# Allegro board CHOPPINGWAVE.brd
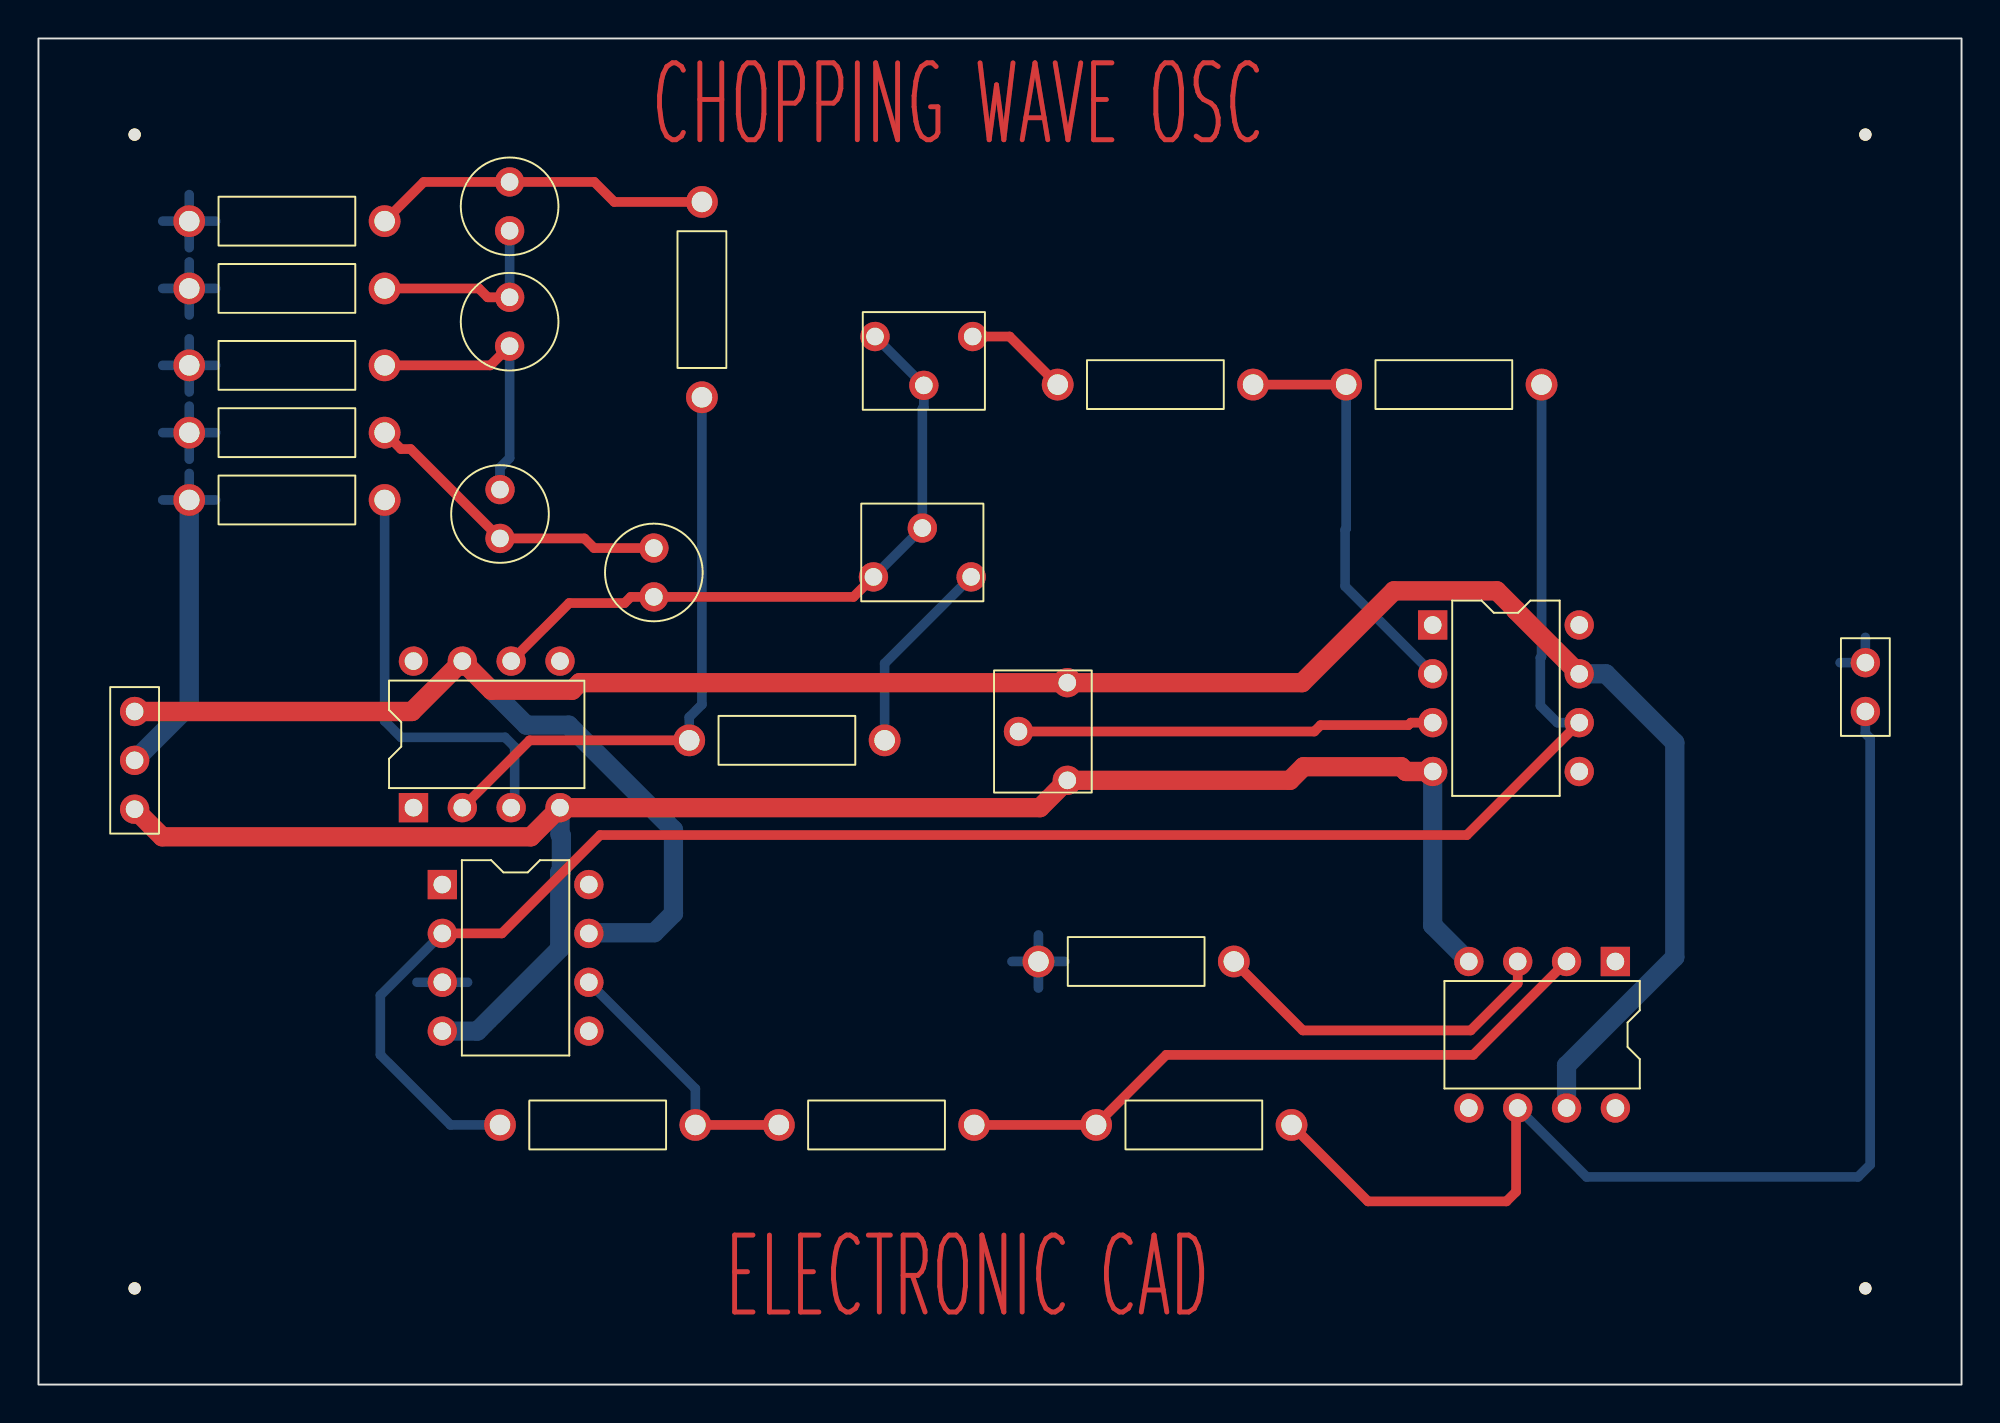
[diagram p0: board, top side]
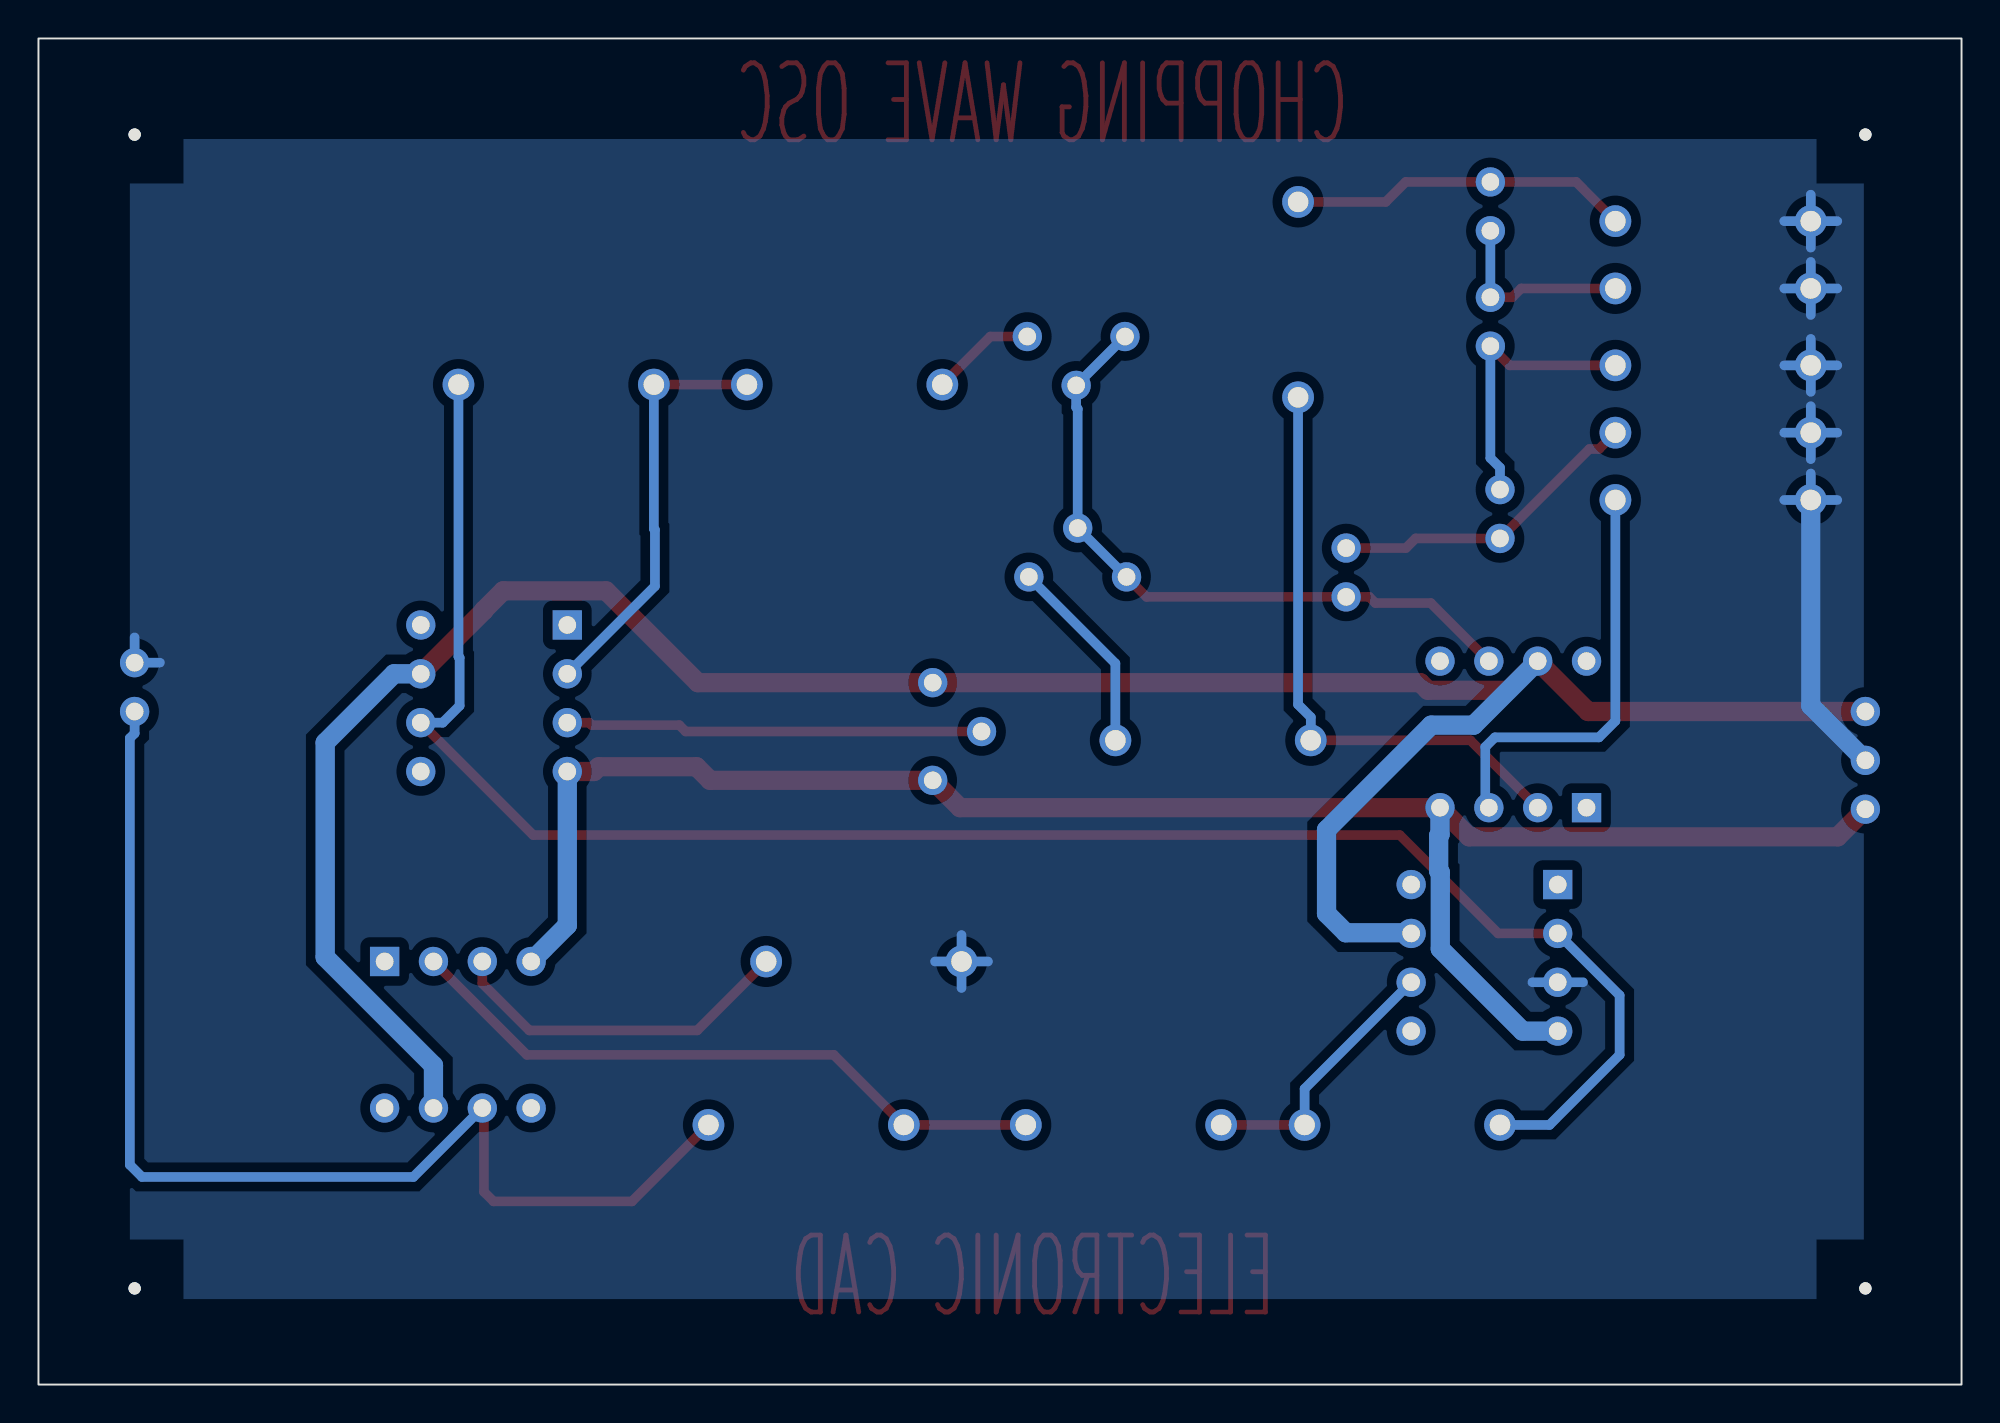
[diagram p1: board, bottom side, seen from below]

Outline 100 x 70 mm; copper layers: TOP, BOTTOM. Coordinates in mm from the lower left corner of the outline.
Outline path: rectangle 0,0 100,70

## Design rules (mm)
nets with their own width: min track width 0.5; nets N000400 N00626 N00633 N00647 N00661 N00679 N00693 N00738 N00771 N00801 N00837 N01571 N01590 N01600 OUT SIG
nets with their own width: min track width 1; nets +12V -12V GND

## Placement (name value [footprint] x y rotation side)
C1  0.01uF  [CAP196]  32 43.5 180 top
C2  0.01uF  [CAP196]  24 44 0 top
C3  0.01uF  [CAP196]  24.5 54 0 top
C4  0.01uF  [CAP196]  24.5 60 0 top
J1  CON3  [JUMPER3]  5 35 270 top
J2  CON2  [JUMPER2]  95 35 90 top
NOREF  -  [unnamed]  5 5 0 top
NOREF#2  -  [#2]  100 0 90 top
NOREF#3  -  [unnamed]  5 65 0 top
NOREF#4  -  [#2]  0 70 0 top
NOREF#5  -  [unnamed]  95 65 0 top
NOREF#6  -  [unnamed]  95 5 0 top
R1  10k  [RES400]  68 52 270 top
R2  15k  [RES400]  44 33.5 90 top
R3  10k  [RES400]  34.5 61.5 180 top
R4  20k  [RES400]  53 52 270 top
R5  4.7k  [RES400]  18 49.5 90 top
R6  4.7k  [RES400]  18 53 90 top
R7  4.7k  [RES400]  18 57 90 top
R8  4.7k  [RES400]  18 60.5 90 top
R9  1k  [RES400]  18 46 90 top
R10  8.2k  [RES400]  24 13.5 270 top
R11  10k  [RES400]  55 13.5 270 top
R12  2.2k  [RES400]  38.5 13.5 270 top
R13  5.1k  [RES400]  52 22 270 top
U1  LF356  [DIP8_3]  19.5 30 90 top
U2  LF356  [DIP8_3]  72.5 39.5 0 top
U3  LF356  [DIP8_3]  21 26 0 top
U4  LF356  [DIP8_3]  82 22 270 top
VR1  470k  [RESADJ]  48.5 42 270 top
VR2  100k  [RESADJ]  43.5 54.5 90 top
VR3  10k  [RESADJ]  53.5 36.5 0 top

## Library data of the parts
C1-C4 = CAP NP: Tolerance: ***; User Part Number: ***
J1 = CON3: User Part Number: ***
J2 = CON2: User Part Number: ***
R1-R13 = R: Tolerance: ***; User Part Number: ***
U1-U4 = LF356_3: Tolerance: ***; User Part Number: ***
VR1-VR3 = POT: Tolerance: ***; User Part Number: ***

## Footprints (pads in the part's own frame, mm; a bottom-side part is the same pattern mirrored in y, then rotated)
CAP196
  round 1.524 hole 0.914: 1(0,0) 2(0,2.54)
DIP8_3
  rect 1.524x1.524 hole 0.914: 1(0,0)
  round 1.524 hole 0.914: 2(0,-2.54) 3(0,-5.08) 4(0,-7.62) 5(7.62,-7.62) 6(7.62,-5.08) 7(7.62,-2.54) 8(7.62,0)
JUMPER2
  round 1.524 hole 0.914: 1(0,0) 2(2.54,0)
JUMPER3
  round 1.524 hole 0.914: 1(0,0) 2(2.54,0) 3(5.08,0)
RES400
  round 1.651 hole 1.067: 1(0,0) 2(0,10.16)
RESADJ
  round 1.524 hole 0.914: 1(0,0) 2(-2.54,-2.54) 3(0,-5.08)
unnamed
  round 0.635 hole 3.175 unplated: (0,0)

## Nets
+12V: J1.1 U1.7 U2.7 U3.7 U4.7 VR3.1
-12V: J1.3 U1.4(V-) U2.4(V-) U3.4(V-) U4.4(V-) VR3.3
GND: J1.2 J2.2 R5.2 R6.2 R7.2 R8.2 R9.2 R13.1 U3.3
OUT: J2.1 R11.2 U4.6
SIG: R1.2 R10.1 U2.6 U3.2
N000400: R2.1 VR1.1
N00626: C1.1 C2.1 R5.1
N00633: C2.2 C3.1 R6.1
N00647: C3.2 C4.1 R7.1
N00661: C4.2 R3.1 R8.1
N00679: R2.2 R3.2 U1.2
N00693: R9.1 U1.3
N00738: C1.2 U1.6 VR1.2(WIPER) VR1.3 VR2.1 VR2.2(WIPER)
N00771: R4.1 VR2.3
N00801: U2.3 VR3.2(WIPER)
N00837: R1.1 R4.2 U2.2
N01571: R11.1 R12.2 U4.2
N01590: R10.2 R12.1 U3.6
N01600: R13.2 U4.3

Pads without a net: U1 1 5 8; U2 1 5 8; U3 1 5 8; U4 1 5 8

## Routing (per net, layer and track width the routed paths; a pad name or vN(x,y) marks a point on that pad's centre or on a via; arc(x,y) is an arc through that point)
+12V: length 132.4
  TOP w1: J1.1 19.42,35 U1.7 23.56,36.1 27.75,36.1 28.14,36.5 VR3.1 65.71,36.5 70.48,41.27 75.83,41.27 76.83,40.27 76.83,40.24 U2.7
  BOTTOM w1: U4.7 79.46,16.59 85.09,22.23 85.09,33.38 81.51,36.96 U2.7 ; U3.7 28.66,23.5 32.02,23.5 33.02,24.5 33.02,28.84 27.57,34.29 25.37,34.29 U1.7
-12V: length 95.6
  TOP w1: J1.3 6.44,28.48 25.6,28.48 U1.4 52.08,30 VR3.3 65.08,31.42 65.78,32.13 70.86,32.13 71.11,31.88 U2.4
  BOTTOM w1: U3.4 22.82,18.38 27.1,22.66 27.1,26.63 27.19,26.71 27.19,28.54 27.12,28.61 U1.4 ; U2.4 72.5,23.88 U4.4
GND: length 51.7
  BOTTOM w0.5: 6.46,60.5 R8.2 ; R8.2 9.22,60.5 ; R8.2 7.84,59.12 ; R8.2 7.84,61.88 ; 6.46,46 R9.2 ; R9.2 9.22,46 ; R9.2 7.84,47.38 ; 95,38.85 J2.2 93.69,37.54 ; R7.2 7.84,58.38 ; R7.2 9.22,57 ; R7.2 7.84,55.62 ; R7.2 6.46,57 ; 6.46,53 R6.2 ; R6.2 7.84,51.62 ; R6.2 9.22,53 ; R6.2 7.84,54.38 ; 50.62,22 R13.1 ; R13.1 52,23.38 ; R13.1 52,20.62 ; R13.1 53.38,22 ; 22.32,20.92 U3.3 19.68,20.92 ; 6.46,49.5 R5.2 ; R5.2 7.84,50.88 ; R5.2 9.22,49.5 ; R5.2 7.84,48.12
  BOTTOM w1: R9.2 7.84,35.3 J1.2
OUT: length 61.7
  TOP w0.5: R11.2 69.14,9.53 76.33,9.53 76.83,10.03 76.83,14.29 U4.6
  BOTTOM w0.5: J2.1 95,33.86 95.25,33.61 95.25,11.43 94.61,10.79 80.5,10.79 U4.6
SIG: length 98.1
  TOP w0.5: U3.2 24.09,23.46 29.21,28.57 74.28,28.57 U2.6
  BOTTOM w0.5: R10.1 21.43,13.5 17.78,17.14 17.78,20.24 U3.2 ; R1.2 78.16,37.86 78.1,37.8 78.1,35.3 78.98,34.42 U2.6
N000400: length 10.4
  BOTTOM w0.5: R2.1 44,37.5 VR1.1
N00626: length 16.5
  TOP w0.5: C1.1 28.89,43.5 28.39,44 C2.1 19.35,48.65 18.85,48.65 R5.1
N00633: length 14.6
  TOP w0.5: C3.1 23.5,53 R6.1
  BOTTOM w0.5: C2.2 24,47.68 24.5,48.18 C3.1
N00647: length 10.2
  TOP w0.5: C3.2 23.36,56.54 22.9,57 R7.1
  BOTTOM w0.5: C4.1 C3.2
N00661: length 17.8
  TOP w0.5: R8.1 20.04,62.54 C4.2 28.9,62.54 29.94,61.5 R3.1
N00679: length 31.4
  TOP w0.5: R2.2 25.54,33.5 U1.2
  BOTTOM w0.5: R3.2 34.5,35.36 33.84,34.7 R2.2
N00693: length 22
  BOTTOM w0.5: R9.1 18,34.51 18.86,33.66 24.27,33.66 24.77,33.16 24.77,30.18 U1.3
N00738: length 35.3
  TOP w0.5: U1.6 27.6,40.64 30.48,40.64 30.8,40.96 C1.2 42.38,40.96 VR1.3
  BOTTOM w0.5: VR1.3 VR1.2 45.96,50.74 46.04,50.82 VR2.2 VR2.1
N00771: length 5.5
  TOP w0.5: VR2.3 50.5,54.5 R4.1
N00801: length 21.7
  TOP w0.5: U2.3 71.36,34.42 71.23,34.29 66.67,34.29 66.34,33.96 VR3.2
N00837: length 21.8
  TOP w0.5: R4.2 R1.1
  BOTTOM w0.5: U2.2 67.94,41.52 67.94,44.45 68,44.51 R1.1
N01571: length 34.3
  TOP w0.5: U4.2 74.61,17.14 58.65,17.14 R11.1 R12.2
N01590: length 14.1
  TOP w0.5: R10.2 R12.1
  BOTTOM w0.5: U3.6 34.16,15.38 R10.2
N01600: length 18.4
  TOP w0.5: U4.3 76.92,20.86 74.47,18.41 65.75,18.41 R13.2

## Copper pours and planes (outline as drawn; the poured copper is in the pictures)
GND on BOTTOM: 95.25,64.77 95.25,4.45 5.08,4.45 5.08,64.77 ; 4 cut-outs

## Text on the board
TOP: CHOPPING WAVE OSC | ELECTRONIC CAD
DIMENSION: FIGURE | FINISHED_SIZE | 0.914 | 1.067 | 3.175 | DRILL CHART: TOP to BOTTOM | ALL UNITS ARE IN MILLIMETERS | PLATED | NON-PLATED | QTY | 54 | 26 | 4
